# Altium PCB Juno_Light_Driver.PcbDoc
Units mm, origin at the board's own origin, x right, y up, seen from the top; angles counter-clockwise.
Board outline 60 x 60 mm, 2 copper layers (Top Layer, Bottom Layer); 30 components, 61 nets, 201 pads, 130 vias.
Unrouted connection lines stored in the file: 1.
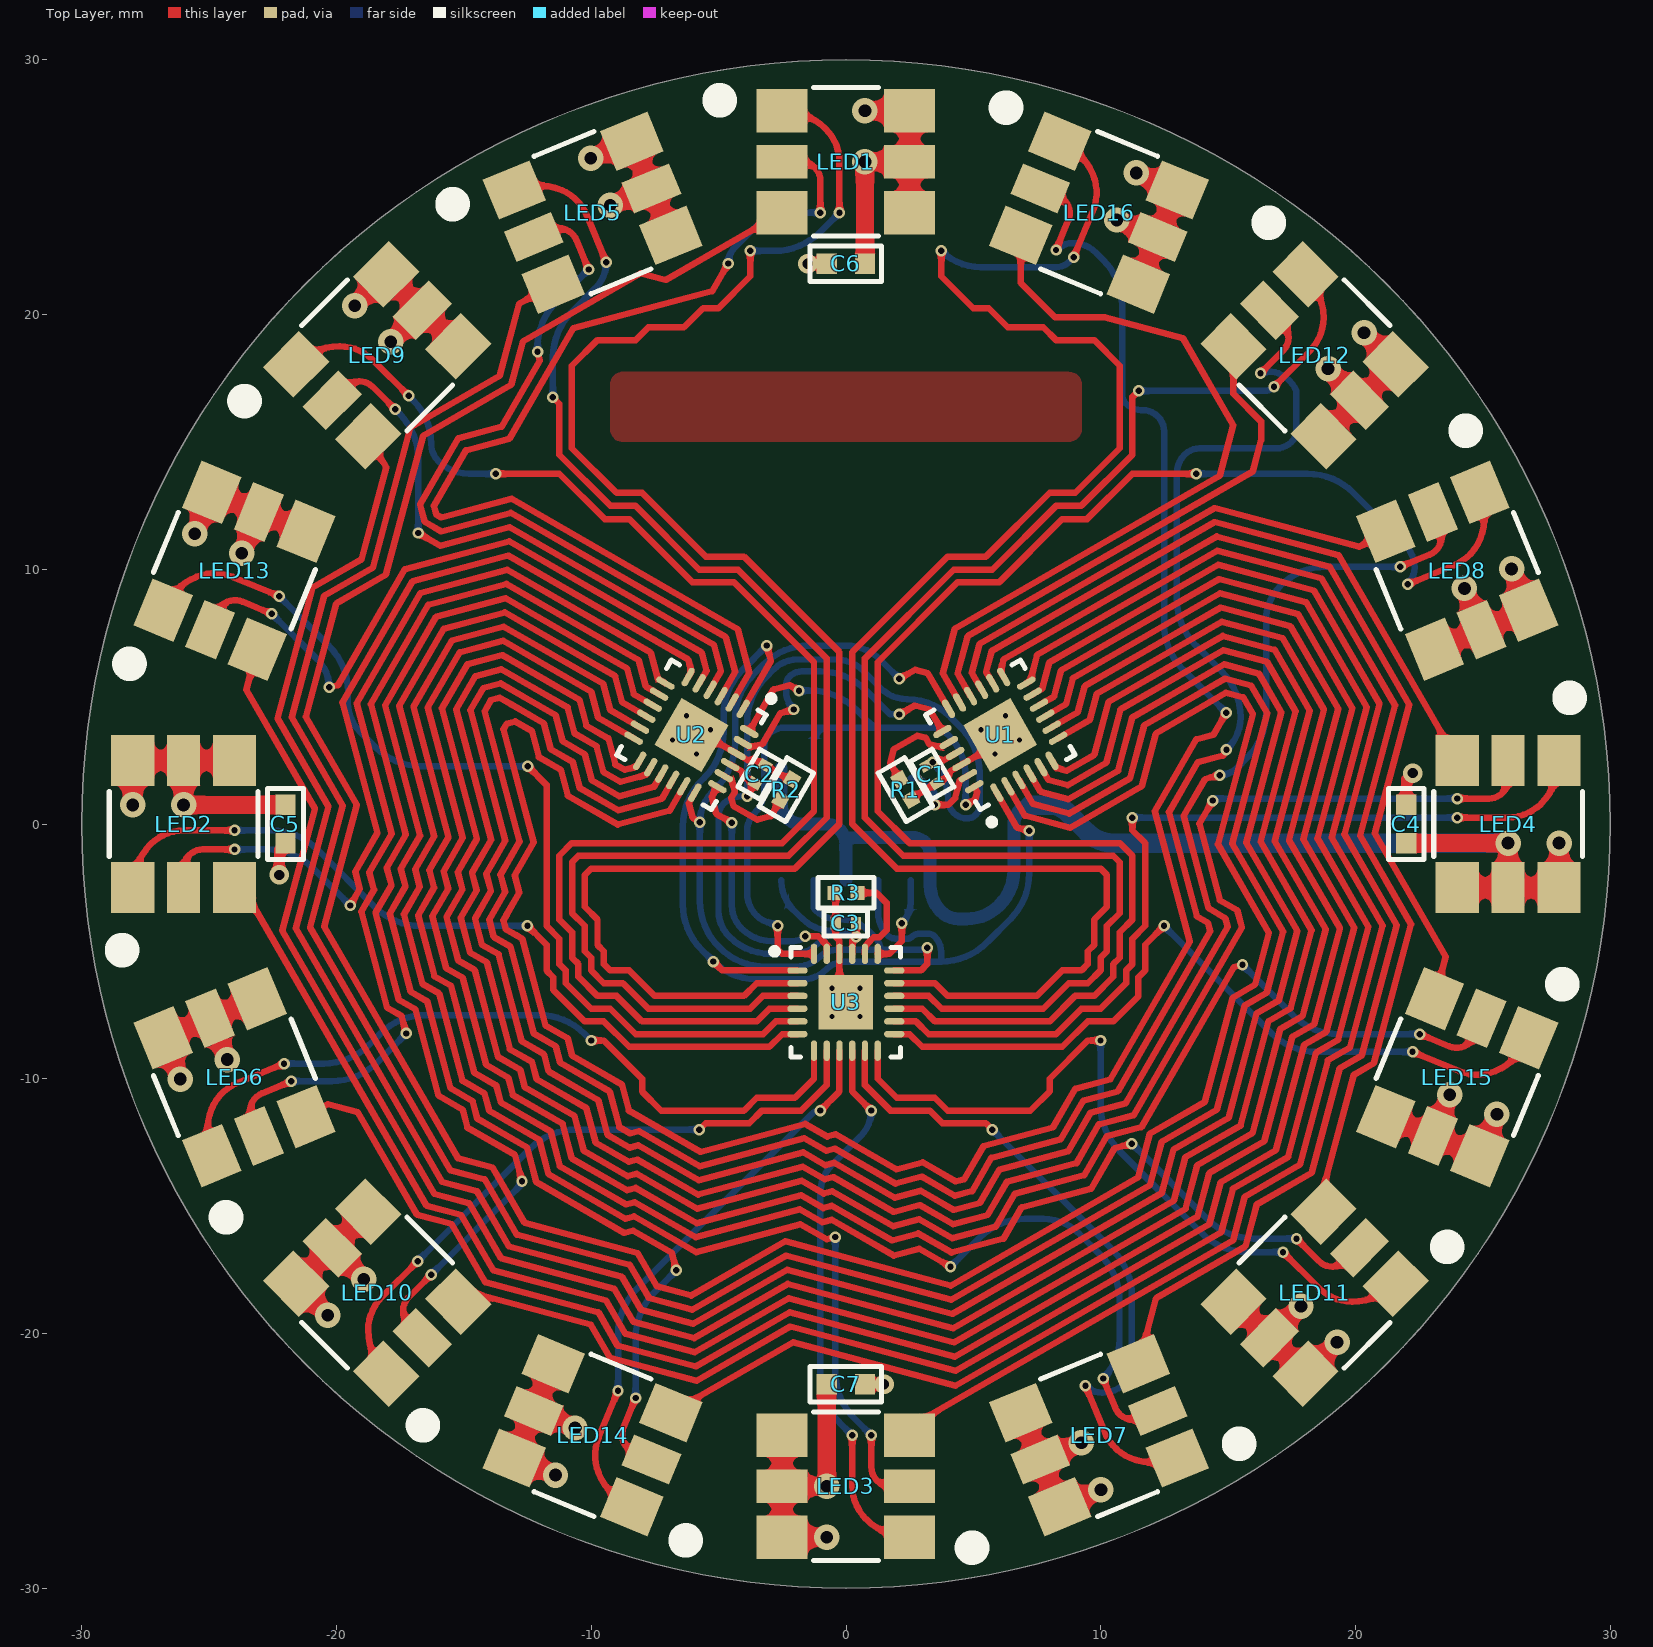
[diagram p0: Top Layer view]
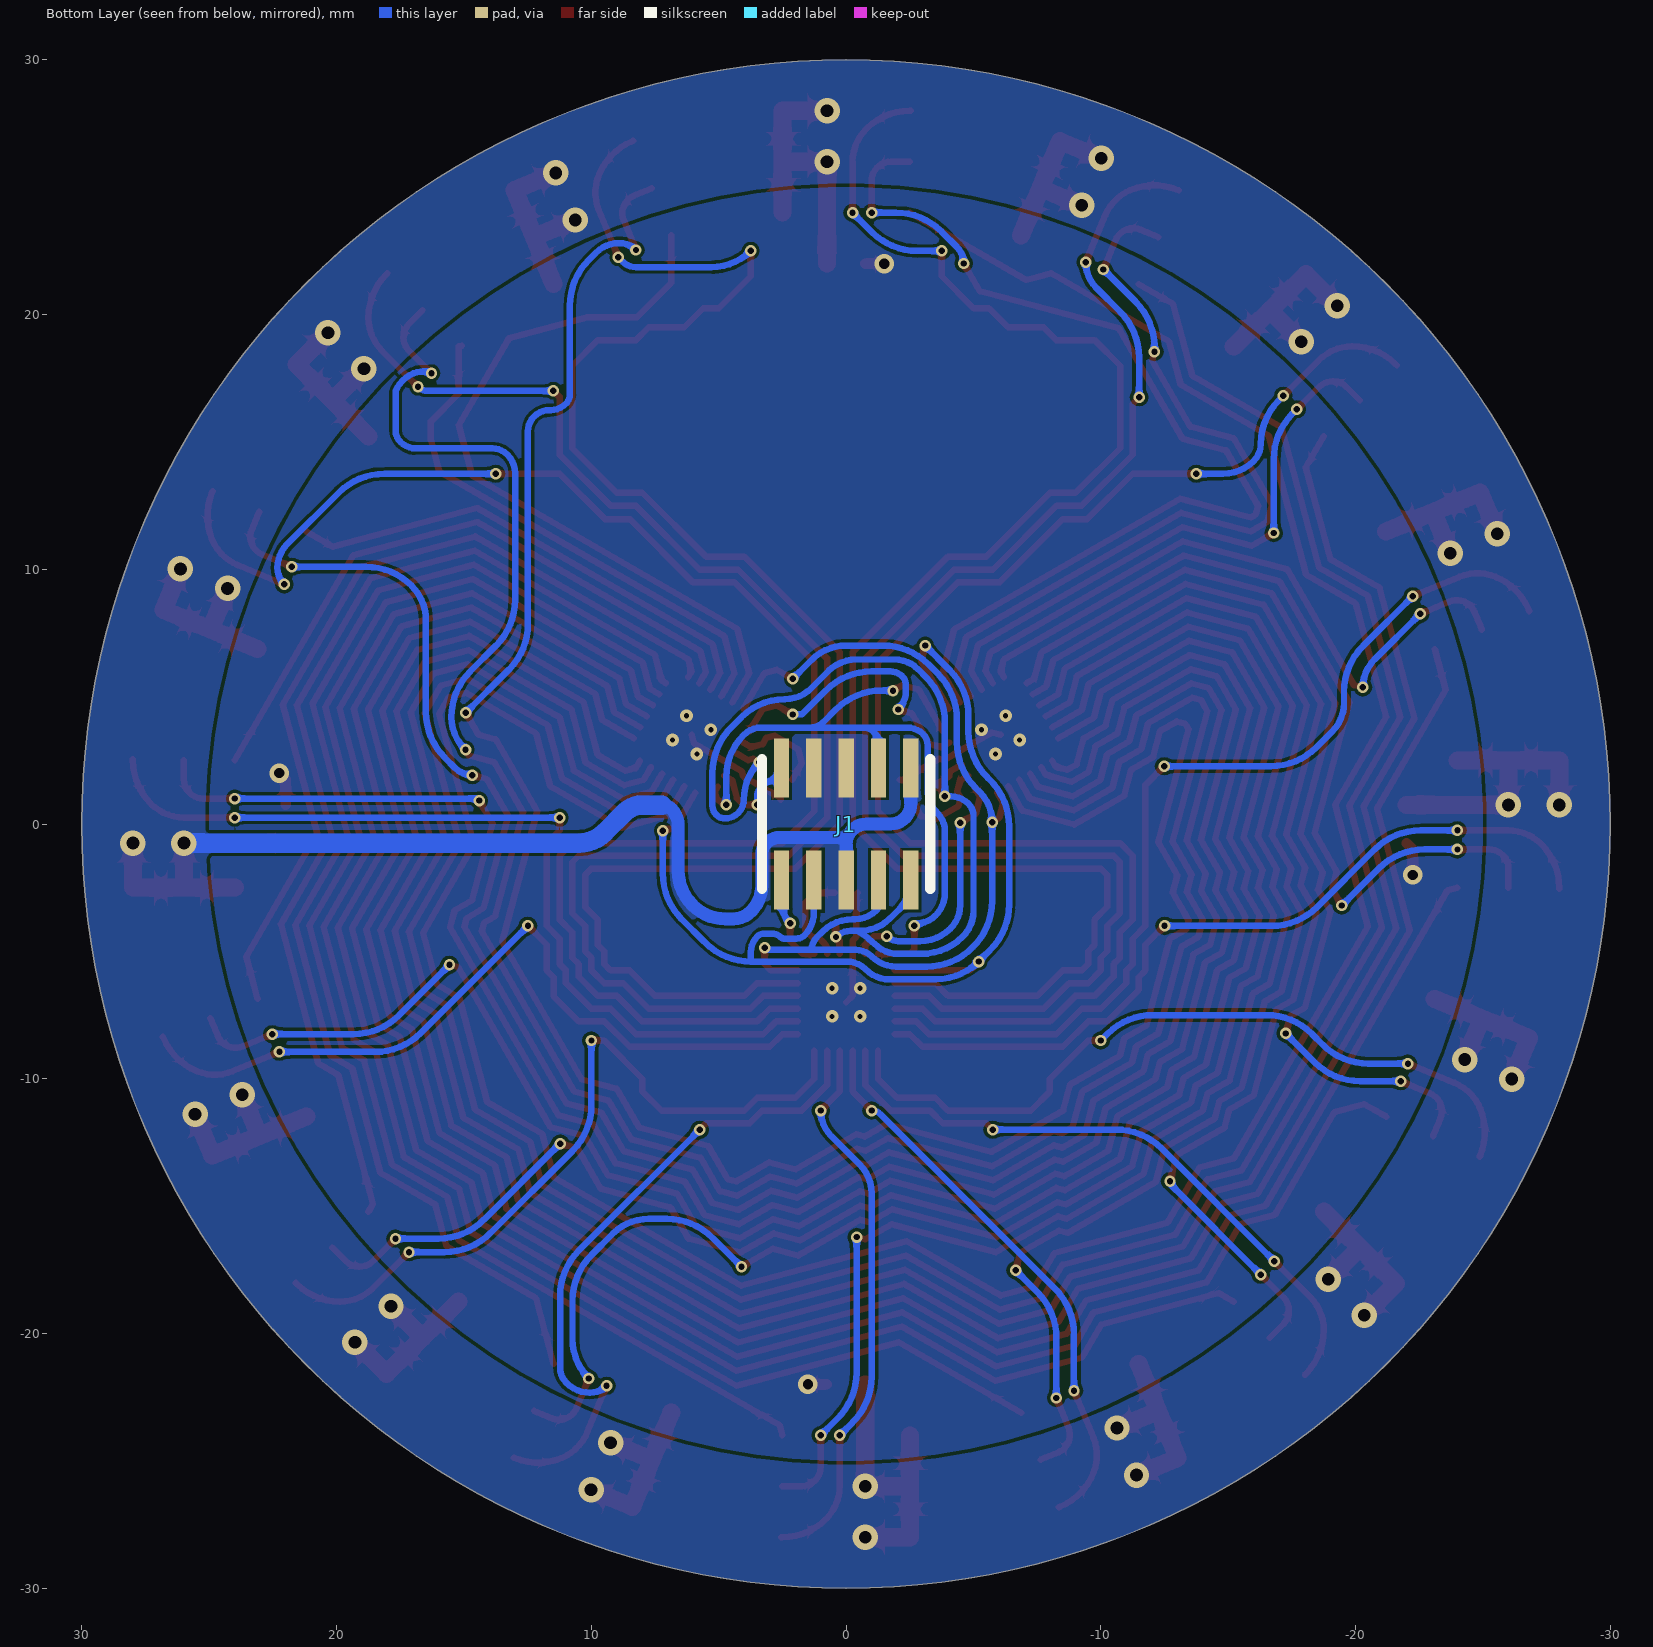
[diagram p1: Bottom Layer view, seen from below]
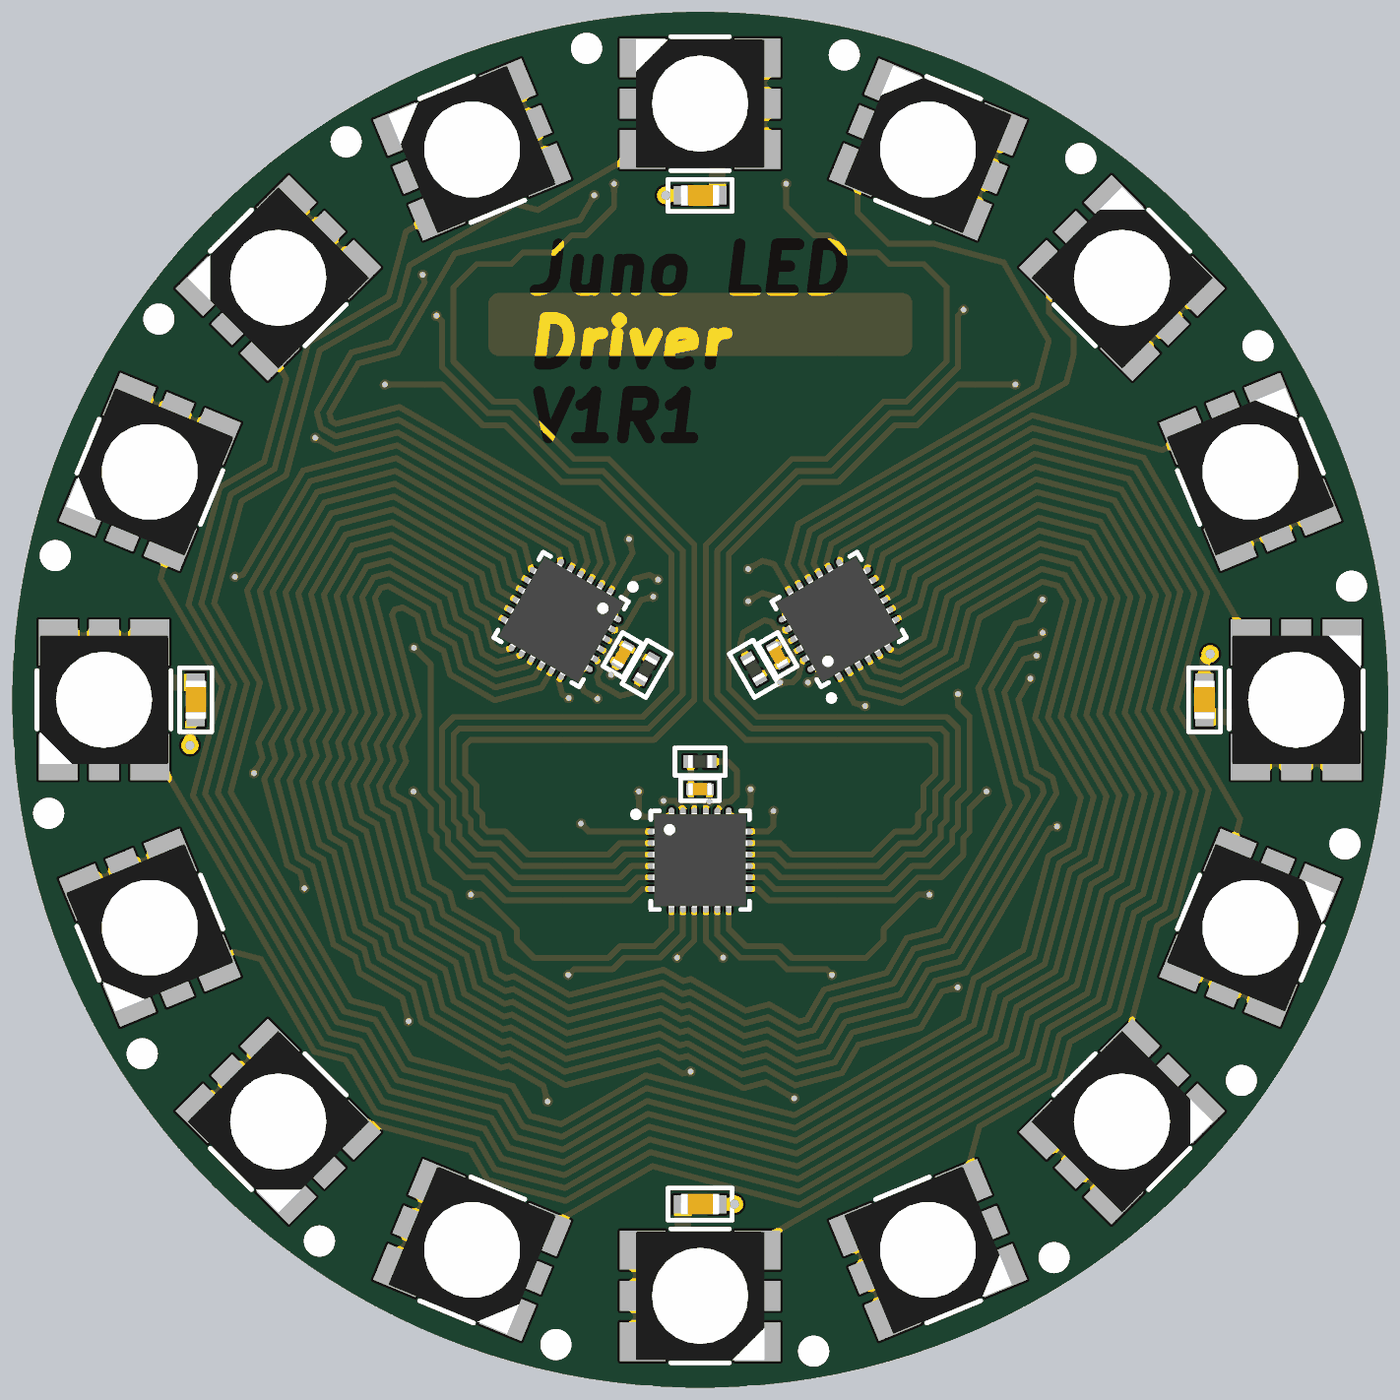
[diagram p2: 3D render of the assembled board from above, using the file's embedded part models]

## Layer stack, top to bottom
Top Solder: solder mask 0.0102, Solder Resist, Dk 3.5
Top Layer: signal copper 0.0356
Dielectric 1: dielectric 0.32, FR-4, Dk 4.8
Bottom Layer: signal copper 0.0356
Bottom Solder: solder mask 0.0102, Solder Resist, Dk 3.5

## Board outline
-30,0 ccw(c0,0) 0,-30 ccw(c0,0) 30,0 ccw(c0,0) 0,30 ccw(c0,0)

## Design rules (kind name [scope] priority, off if disabled: settings)
Clearance [All] p1: gap=0.127 ignorepadtopadclearanceinfootprint=FALSE
MinimumSolderMaskSliver [All] p1 off: minsoldermaskwidth=0.254
PolygonConnect [All] p1: connectstyle=Direct reliefconductorwidth=0.254 reliefentries=4 polygonreliefangle="90 Angle" airgapwidth=0.254
RoutingVias [All] p1: holewidth=0.711 width=1.27 viastyle="Through Hole" minholewidth=0.2 minwidth=0.45 maxholewidth=0.711 maxwidth=1.27
SilkToSilkClearance [All] p1 off: silktosilkclearance=0.254
SilkToSolderMaskClearance [IsPad] p1 off: minsilkscreentomaskgap=0.254 clearancetoexposedcopper=TRUE
SolderMaskExpansion [All] p1: expansion=0.102
Width [All] p1: maxlimit=5.08 minlimit=0.152 preferedwidth=0.254 minimp=50.000000 maximp=50.000000 favimp=50.000000
27 further rules are at their usual default settings.

## Classes and differential pairs
component class "[02] - TRICOLOR LEDS": C4 C5 C6 C7 LED1 LED2 LED3 LED4 LED5 LED6 LED7 LED8 LED9 LED10 LED11 LED12 LED13 LED14 LED15 LED16
component class "[01] - LED DRIVER": C1 C2 C3 J1 R1 R2 R3 U1 U2 U3

## Components (designator, comment, footprint, x,y, rotation, side; value= is the part's Value field where it differs from the comment)
C1 "0.1uF" C0402 3.372,1.95 r300 top
C2 "0.1uF" C0402 -3.383,1.95 r60 top
C3 "0.1uF" C0402 -0.006,-3.9 r180 top
C4 "10uF" C0603 21.994,0 r90 top
C5 "10uF" C0603 -22.006,0 r270 top
C6 "10uF" C0603 -0.006,22 r180 top
C7 "10uF" C0603 -0.006,-22 r0 top
J1 "20021121-00010C4LF" 20021121-00010C4LF -0.006,0 r180 bottom
LED1 "SLV6A-FKB-CK1P1G1BB7R3R3" "CREE SLV6A-FKB" -0.006,26 r0 top
LED2 "SLV6A-FKB-CK1P1G1BB7R3R3" "CREE SLV6A-FKB" -26.006,0 r90 top
LED3 "SLV6A-FKB-CK1P1G1BB7R3R3" "CREE SLV6A-FKB" -0.006,-26 r180 top
LED4 "SLV6A-FKB-CK1P1G1BB7R3R3" "CREE SLV6A-FKB" 25.994,0 r270 top
LED5 "SLV6A-FKB-CK1P1G1BB7R3R3" "CREE SLV6A-FKB" -9.947,24 r22.5 top
LED6 "SLV6A-FKB-CK1P1G1BB7R3R3" "CREE SLV6A-FKB" -24.006,-9.941 r112.5 top
LED7 "SLV6A-FKB-CK1P1G1BB7R3R3" "CREE SLV6A-FKB" 9.935,-24 r202.5 top
LED8 "SLV6A-FKB-CK1P1G1BB7R3R3" "CREE SLV6A-FKB" 23.994,9.941 r292.5 top
LED9 "SLV6A-FKB-CK1P1G1BB7R3R3" "CREE SLV6A-FKB" -18.406,18.4 r45 top
LED10 "SLV6A-FKB-CK1P1G1BB7R3R3" "CREE SLV6A-FKB" -18.406,-18.4 r135 top
LED11 "SLV6A-FKB-CK1P1G1BB7R3R3" "CREE SLV6A-FKB" 18.394,-18.4 r225 top
LED12 "SLV6A-FKB-CK1P1G1BB7R3R3" "CREE SLV6A-FKB" 18.394,18.4 r315 top
LED13 "SLV6A-FKB-CK1P1G1BB7R3R3" "CREE SLV6A-FKB" -24.006,9.941 r67.5 top
LED14 "SLV6A-FKB-CK1P1G1BB7R3R3" "CREE SLV6A-FKB" -9.947,-24 r157.5 top
LED15 "SLV6A-FKB-CK1P1G1BB7R3R3" "CREE SLV6A-FKB" 23.994,-9.941 r247.5 top
LED16 "SLV6A-FKB-CK1P1G1BB7R3R3" "CREE SLV6A-FKB" 9.935,24 r337.5 top
R1 "18K" R0402 2.332,1.35 r120 top
R2 "18K" R0402 -2.344,1.35 r240 top
R3 "18K" R0402 -0.006,-2.7 r0 top
U1 "LED1642GWQTR" QFN24 6.056,3.5 r120 top
U2 "LED1642GWQTR" QFN24 -6.068,3.5 r240 top
U3 "LED1642GWQTR" QFN24 -0.006,-7 r0 top

## Footprints (in the part's own frame and the unit in brackets; to place one, negate y for a bottom-side part, rotate by r counter-clockwise, add the part's x,y. Pads: shape width x height; smd on the part's side, far side on the other; paste and mask are expansions set on the pad)
20021121-00010C4LF [mm]
  rect 0.6x2.3 smd: 1(-2.54,2.2) 2(-1.27,2.2) 3(0,2.2) 4(1.27,2.2) 5(2.54,2.2) 6(2.54,-2.2) 7(1.27,-2.2) 8(0,-2.2) 9(-1.27,-2.2) 10(-2.54,-2.2)
  silkscreen extent -3.3,-2.54 3.3,2.54, body extent -3.18,-2.75 3.17,2.75, height 4.5
C0402 [mm] "Chip Capacitor, 2-Leads, Body 1.00x0.50mm, IPC Medium Density"
  rect 0.4x0.5 smd: 1(-0.4,0) 2(0.4,0)
  silkscreen extent -0.85,-0.5 0.85,0.5, body extent -0.52,-0.27 0.53,0.28, height 0.55
C0603 [mm] "Chip Capacitor, 2-Leads, Body 1.60x0.80mm, IPC Medium Density"
  rect 0.8x0.8 smd: 1(-0.75,0) 2(0.75,0)
  silkscreen extent -1.4,-0.7 1.4,0.7, body extent -0.85,-0.45 0.85,0.45, height 0.9
"CREE SLV6A-FKB" [mm]
  rect 2x1.7 smd: 1(-2.5,2) 3(-2.5,-2) 4(2.5,-2) 6(2.5,2)
  rect 2x1.3 smd: 2(-2.5,0) 5(2.5,0)
  silkscreen extent -5.13,-2.92 1.27,2.92, body extent -2.8,-2.8 2.8,2.8, height 2.6
QFN24 [mm] "QFN, 24-Leads, Body 3.93x3.93mm, Pitch 0.50mm, Thermal Pad 2.13x2.13mm, IPC High Density"
  oval 0.8x0.25 smd: 1(-1.9,1.25) 2(-1.9,0.75) 3(-1.9,0.25) 4(-1.9,-0.25) 5(-1.9,-0.75) 6(-1.9,-1.25) 13(1.9,-1.25) 14(1.9,-0.75) 15(1.9,-0.25) 16(1.9,0.25) 17(1.9,0.75) 18(1.9,1.25)
  oval 0.25x0.8 smd: 7(-1.25,-1.9) 8(-0.75,-1.9) 9(-0.25,-1.9) 10(0.25,-1.9) 11(0.75,-1.9) 12(1.25,-1.9) 19(1.25,1.9) 20(0.75,1.9) 21(0.25,1.9) 22(-0.25,1.9) 23(-0.75,1.9) 24(-1.25,1.9)
  rect 2.13x2.13 smd: 25(0,0)
  silkscreen extent -2.92,-2.15 2.15,2.15, body extent -2.05,-2.05 2.05,2.05, height 1
R0402 [mm] "Chip Resistor, 2-Leads, Body 1.00x0.50mm, IPC Medium Density"
  rect 0.55x0.55 smd: 1(-0.45,0) 2(0.45,0)
  silkscreen extent -1.1,-0.6 1.1,0.6, body extent -0.52,-0.28 0.52,0.28, height 0.4

## Part data
C1 C2 C3: library part CL05B104KO5NNNC, "Cap Ceramic 0.1uF 16V X7R 10% SMD 0402 125C C/T", Capacitance=100nF, Case/Package=0402, Case Code (Metric)=1005, Dielectric=X7R, Manufacturer 1=Samsung, Max Operating Temperature=125°C, Min Operating Temperature=-55°C, Package Quantity=1, Supplier Part Number 1=1276-1001-6-ND, Tolerance=10%, Voltage=16V, Case Code (Imperial)=0402, ComponentLink1Description=https://datasheet.ciiva.com/16208/cl05b104kq5nnnc-16208343.pdf, ComponentLink1URL=https://datasheet.ciiva.com/16208/cl05b104kq5nnnc-16208343.pdf, ComponentLink2Description=https://datasheet.ciiva.com/26920/getdatasheetpartid-359683-26920169.pdf, ComponentLink2URL=https://datasheet.ciiva.com/26920/getdatasheetpartid-359683-26920169.pdf, ComponentLink3Description=https://datasheet.ciiva.com/26309/mlcc-catalogdownload2013-eng-26309003.pdf, ComponentLink3URL=https://datasheet.ciiva.com/26309/mlcc-catalogdownload2013-eng-26309003.pdf, ComponentLink4Description=https://datasheet.ciiva.com/29198/458718-da-01-en-vs-kondensator-0402-29198423.pdf, ComponentLink4URL=https://datasheet.ciiva.com/29198/458718-da-01-en-vs-kondensator-0402-29198423.pdf, Contact Plating=Tin, Depth=0.5mm, Description 1="Cap Ceramic 0.1uF 16V X7R 10% SMD 0402 125C Paper T/R", Height=0.5mm, Lead Free="Lead Free", Length=1mm, Manufacturer Part Number 1=CL05B104KO5NNNC, Material=Ceramic, Mount="Surface Mount", Packaging="Tape and Reel", Pricing 1="1=0.1, 10=0.018, 100=0.0081, 500=0.0058, 1000=0.0045, 2500=0.0041, 5000=0.0038 (USD)", Radiation Hardening=No, Stock 1=9531, Supplier 1=Digi-Key, Thickness=0.022inch, Voltage Rating=16V, Voltage Rating (DC)=16V, Width=0.02inch
C4 C5 C6 C7: library part GRM188R61A106KE69D, "Cap Ceramic 10uF 10V X5R 10% SMD 0603 85C Paper T/R", Case/Package=0603, Case Code (Metric)=1608, Dielectric=X5R, Manufacturer=Murata, Max Operating Temperature=85°C, Min Operating Temperature=-55°C, Supplier Part Number 1=490-10474-1-ND, Tolerance=10%, Voltage=10V, Capacitance=10uF, Case Code (Imperial)=0603, Depth=0.8mm, Description 1="Cap Ceramic 10uF 10V X5R 10% SMD 0603 85C Paper T/R", Height=0.8mm, Lead Free="Lead Free", Length=1.6mm, Manufacturer Part Number 1=GRM188R61A106KE69D, Mount="Surface Mount", Packaging="Tape and Reel", Pricing="1=0.22, 10=0.149, 100=0.0754, 500=0.05158, 1000=0.04563 (USD)", REACH SVHC="No SVHC", Stock=40000, Supplier 1=Digi-Key, Thickness=0.037inch, Voltage Rating=10V, Voltage Rating (DC)=10V, Width=0.031inch
J1: "CONN HEADER SMD 10POS 1.27MM", Color=Black, Contact Resistance=30mR, Current Rating=1A, Insulation Resistance=100MR, Manufacturer="Amphenol FCI", Max Operating Temperature=85°C, Max Voltage Rating (AC)=125V, Min Operating Temperature=-40°C, Package Quantity=600, Supplier Part Number 1=609-3695-1-ND, ComponentLink1Description=https://www.verical.com/server-webapp/html/getDatasheet?partID=177140&src-supplier=Verical, ComponentLink1URL=https://www.verical.com/server-webapp/html/getDatasheet?partID=177140&src-supplier=Verical, ComponentLink2Description=http://portal.fciconnect.com/Comergent/fci/drawing/20021121.pdf?src-supplier=Avnet, ComponentLink2URL=http://portal.fciconnect.com/Comergent/fci/drawing/20021121.pdf?src-supplier=Avnet, ComponentLink3Description=https://cdn.amphenol-icc.com/media/wysiwyg/files/drawing/20021121.pdf?src-supplier=Digi-Key, ComponentLink3URL=https://cdn.amphenol-icc.com/media/wysiwyg/files/drawing/20021121.pdf?src-supplier=Digi-Key, ComponentLink4Description=http://portal.fciconnect.com/Comergent/fci/drawing/20021121.pdf?src-supplier=Avnet+Europe, ComponentLink4URL=http://portal.fciconnect.com/Comergent/fci/drawing/20021121.pdf?src-supplier=Avnet+Europe, ComponentLink5Description=https://media.digikey.com/pdf/Data%20Sheets/FCI%20PDFs/Minitek%20127_Catalog.pdf?src-supplier=Digi-Key, ComponentLink5URL=https://media.digikey.com/pdf/Data%20Sheets/FCI%20PDFs/Minitek%20127_Catalog.pdf?src-supplier=Digi-Key, ComponentLink6Description=http://portal.fciconnect.com/Comergent//fci/drawing/20021121.pdf?src-supplier=Mouser, ComponentLink6URL=http://portal.fciconnect.com/Comergent//fci/drawing/20021121.pdf?src-supplier=Mouser, Connector Type="Male Pin,Header", Contact Material="Copper Alloy,Copper,Gold", Contact Mating Length=0.12inch, Contact Plating=Gold, Depth=3.4mm, Gender=Male, Housing Color=Black, Housing Material=Thermoplastic, Length=6.35mm, Manufacturer Part Number=20021121-00010C4LF, Mount="Surface Mount", Number of Contacts=10, Number of Positions=10, Number of Rows=2, Orientation=Straight, Packaging="Tape and Reel", Pitch=1.27mm, Pricing 1="1=0.84, 10=0.739, 100=0.6372 (USD)", Radiation Hardening=No, REACH SVHC="No SVHC", Row Spacing=0.05inch, Stack Height=3mm, Stock 1=79305, Supplier 1=Digi-Key, Termination=Solder, Voltage Rating=125V
LED1 LED2 LED3 LED4 LED5 LED6 LED7 LED8 LED9 LED10 LED11 LED12 LED13 LED14 LED15 LED16: "LED RGB 6PLCC SMD", Case/Package=SMD/SMT, Color=Blue,Green,Red, Forward Voltage=3.2V, Manufacturer=Cree, Supplier Part Number 1=SLV6A-FKB-CK1P1G1BB7R3R3CT-ND, Test Current=20mA, Dominant Wavelength=470nm, Height=2.6mm, Length=5.5mm, Luminous Intensity=420mcd, Manufacturer Part Number=SLV6A-FKB-CK1P1G1BB7R3R3, Mount="Surface Mount", Packaging="Tape and Reel", Pricing 1="1=0.42, 10=0.395, 100=0.3648, 1000=0.32631 (USD)", Stock 1=101474, Supplier 1=Digi-Key, Width=5.3mm
R1 R2 R3: library part CRGCQ0402F18K, Manufacturer="TE Connectivity", Supplier Part Number 1=A129642CT-ND, Manufacturer Part Number=CRGCQ0402F18K, Pricing 1="1=0.1, 10=0.022, 100=0.009, 1000=0.00406, 2500=0.00352, 5000=0.00291 (USD)", Stock 1=128806, Supplier 1=Digi-Key
U1 U2 U3: "IC LED DRIVER LIN DIM 40MA 24QFN", Case/Package=QFN, Frequency=30MHz, Manufacturer=STMicroelectronics, Max Input Voltage=5.5V, Max Operating Temperature=85°C, Max Output Current=50mA, Max Output Voltage=19V, Max Supply Current=10mA, Min Input Voltage=3V, Min Operating Temperature=-40°C, Nominal Input Voltage (DC)=3.3V, Output Current per Channel=40mA, Package Quantity=4000, Supplier Part Number 1=497-14029-1-ND, ComponentLink1Description=http://www.st.com/content/ccc/resource/technical/document/datasheet/ae/9b/e2/7c/7d/66/41/08/DM00080246.pdf/files/DM00080246.pdf/jcr:content/translations/en.DM00080246.pdf?src-supplier=Digi-Key, ComponentLink1URL=http://www.st.com/content/ccc/resource/technical/document/datasheet/ae/9b/e2/7c/7d/66/41/08/DM00080246.pdf/files/DM00080246.pdf/jcr:content/translations/en.DM00080246.pdf?src-supplier=Digi-Key, ComponentLink2Description=https://www.verical.com/server-webapp/html/getDatasheet?partID=789956&src-supplier=Verical, ComponentLink2URL=https://www.verical.com/server-webapp/html/getDatasheet?partID=789956&src-supplier=Verical, ComponentLink3Description=http://www.st.com/web/en/resource/technical/document/datasheet/DM00080246.pdf?src-supplier=Avnet, ComponentLink3URL=http://www.st.com/web/en/resource/technical/document/datasheet/DM00080246.pdf?src-supplier=Avnet, Dimming=PWM, Height=0.95mm, Lead Free="Lead Free", Length=4.15mm, Manufacturer Part Number=LED1642GWQTR, Max Input Voltage (DC)=5.5V, Max Supply Voltage=5.5V, Min Input Voltage (DC)=3V, Min Supply Voltage=3V, Mount="Surface Mount", Nominal Supply Current=10mA, Number of Channels=16, Number of Outputs=16, Number of Pins=24, Operating Supply Voltage=3.3V, Output Current=50mA, Output Voltage=19V, Packaging="Tape and Reel", Pricing 1="1=2.1, 10=1.883, 100=1.5138, 500=1.24372, 1000=1.03052 (USD)", Radiation Hardening=No, REACH SVHC="No SVHC", Stock 1=43999, Supplier 1=Digi-Key, Switching Frequency=30MHz, Width=4.15mm

## Via types
v1: diameter 0.45, hole 0.25, Top Layer to Bottom Layer, tented both sides, 82 vias
v2: diameter 1, hole 0.5, Top Layer to Bottom Layer, 32 vias
v3: diameter 0.5, hole 0.2, Top Layer to Bottom Layer, 12 vias
v4: diameter 0.762, hole 0.406, Top Layer to Bottom Layer, 4 vias

## Nets (pads, with @x,y where several pads share a name; then routed paths per layer and width w, separated by ;. In a path a pad name is that pad's centre, name@x,y a point inside that pad or via, vN(x,y) a via of type N, cw(c..) or ccw(c..) an arc to the next point about the centre after c; other vN are vias at no path point)
+3V3: C1.1 C2.1 C3.1 J1.6 U1.21 U2.21 U3.21 | length 39.7
  Top Layer w0.254: U2.21 -4.101,2.076 -4.047,1.871 C2.1 v1(-3.883,1.084) ; U3.21 0.244,-4.585 v1(0.394,-4.435) C3.1 ; v1(3.403,2.43) 3.635,2.564 3.84,2.509 U1.21
  Bottom Layer w0.254: J1.6 ccw(c-0.876,-2.2) -2.057,-3.381 -1.738,-3.7 ccw(c-0.543,-2.505) -0.543,-4.195 -0.442,-4.195 ; v1(0.394,-4.435) ccw(c-0.185,-5.014) -0.185,-4.195 -0.442,-4.195 ; v1(3.403,2.43) cw(c1.927,0.954) 4.014,0.954 ccw(c4.75,0.954) 4.75,0.219 ccw(c4.75,0.711) 5.242,0.711 5.242,2.004 ccw(c2.702,2.004) 4.498,3.8 4.103,4.195 ccw(c2.402,2.494) 2.402,4.9 cw(c2.402,6.367) 1.365,5.329 0.694,6 ccw(c-0.411,4.895) -0.411,6.458 -1.906,6.458 ccw(c-1.906,5.149) -2.832,6.074 -3.14,5.766 ccw(c-1.343,3.97) -3.883,3.97 v1(-3.883,1.084) -4.12,1.084 ccw(c-4.12,0.114) -4.806,0.8 ccw(c-4.323,0.317) -5.006,0.317 -5.006,-3.4 ccw(c-3.557,-3.4) -4.582,-4.424 ccw(c-2.95,-2.793) -2.95,-5.1 -2.072,-5.1 ccw(c-2.072,-3.734) -1.106,-4.7 -1.05,-4.644 cw(c0.746,-6.44) -0.442,-4.195
+VBATT: C4.1 C5.1 C6.1 C7.1 J1.5 J1.8 LED1.4 LED1.5 LED1.6 LED2.4 LED2.5 LED2.6 LED3.4 LED3.5 LED3.6 LED4.4 LED4.5 LED4.6 LED5.4 LED5.5 LED5.6 LED6.4 LED6.5 LED6.6 LED7.4 LED7.5 LED7.6 LED8.4 LED8.5 LED8.6 LED9.4 LED9.5 LED9.6 LED10.4 LED10.5 LED10.6 LED11.4 LED11.5 LED11.6 LED12.4 LED12.5 LED12.6 LED13.4 LED13.5 LED13.6 LED14.4 LED14.5 LED14.6 LED15.4 LED15.5 LED15.6 LED16.4 LED16.5 LED16.6 | length 174.5
  Top Layer w0.711: v2(-28.006,0.75) LED2.6 LED2.5 ; v2(-26.141,-10.013) LED6.6 LED6.5 ; v2(-25.567,11.399) LED13.6 LED13.5 ; v2(-24.293,-9.248) LED6.5 ; LED2.4 LED2.5 ; v2(-23.719,10.634) LED13.5 ; LED6.4 LED6.5 ; C5.1 v2(-26.006,0.75) LED2.5 ; LED13.4 LED13.5 ; v2(-20.35,-19.284) LED10.6 LED10.5 ; v2(-19.29,20.345) LED9.6 LED9.5 ; v2(-18.936,-17.87) LED10.5 ; LED10.4 LED10.5 ; v2(-17.876,18.93) LED9.5 ; LED9.4 LED9.5 ; LED14.4 LED14.5 ; v2(-11.405,-25.561) LED14.6 LED14.5 ; v2(-10.64,-23.713) LED14.5 ; v2(-10.019,26.135) LED5.6 LED5.5 ; v2(-9.254,24.287) LED5.5 ; LED5.4 LED5.5 ; LED3.4 LED3.5 ; v2(-0.756,-28) LED3.6 LED3.5 ; C7.1 v2(-0.756,-26) LED3.5 ; C6.1 v2(0.744,26) LED1.5 ; v2(0.744,28) LED1.6 LED1.5 ; LED1.4 LED1.5 ; LED7.4 LED7.5 ; v2(9.242,-24.287) LED7.5 ; v2(10.008,-26.135) LED7.6 LED7.5 ; v2(10.628,23.713) LED16.5 ; v2(11.393,25.561) LED16.6 LED16.5 ; LED16.4 LED16.5 ; LED11.4 LED11.5 ; v2(17.864,-18.93) LED11.5 ; LED12.4 LED12.5 ; v2(18.924,17.87) LED12.5 ; v2(19.278,-20.345) LED11.6 LED11.5 ; v2(20.339,19.284) LED12.6 LED12.5 ; LED15.4 LED15.5 ; C4.1 v2(25.994,-0.75) LED4.5 ; LED8.4 LED8.5 ; v2(23.707,-10.634) LED15.5 ; LED4.4 LED4.5 ; v2(24.281,9.248) LED8.5 ; v2(25.555,-11.399) LED15.6 LED15.5 ; v2(26.129,10.013) LED8.6 LED8.5 ; v2(27.994,-0.75) LED4.6 LED4.5
  Bottom Layer w0.508: J1.5 -2.546,0.796 ccw(c-1.75,0.796) -1.75,0 -0.802,0 cw(c-0.802,-0.796) -0.006,-0.796 ; J1.8 -0.006,-0.796 ; 0.247,-0.543 ccw(c0.247,-0.796) -0.006,-0.796 ; 0.399,-0.523 2.58,-0.523 cw(c2.58,-1.299) 3.129,-0.75 cw(c2.703,-1.176) 3.306,-1.176 3.306,-2.408 ccw(c4.768,-2.408) 3.734,-3.442 ccw(c4.424,-2.752) 4.424,-3.727 4.725,-3.727 ccw(c4.725,-1.888) 6.025,-3.189 ccw(c4.667,-1.83) 6.588,-1.83 6.588,-0.049 cw(c7.491,-0.049) 6.853,0.59 cw(c7.222,0.22) 7.222,0.743
  Bottom Layer w0.762: 7.222,0.743 8.018,0.743 cw(c8.018,-0.185) 8.674,0.471 9.471,-0.326 ccw(c10.495,0.698) 10.495,-0.75 v2(25.994,-0.75)
CLK: J1.4 U1.24 U2.24 U3.24 | length 30.6
  Top Layer w0.254: U2.24 -2.846,5.282 -2.213,5.451 v1(-1.845,5.239) ; v1(-2.682,-4) -2.682,-4.926 -2.507,-5.1 U3.24 ; v1(4.7,0.754) 5.076,0.971 5.154,1.262 U1.24
  Bottom Layer w0.254: v1(-2.682,-4) -2.782,-3.9 cw(c-2.782,-2.876) -3.506,-3.6 -3.514,-3.592 cw(c-2.622,-2.7) -3.883,-2.7 -3.883,-0.27 cw(c-2.936,-0.27) -3.606,0.4 ccw(c-4.572,1.366) -3.605,0.401 ccw(c-4.572,1.366) -3.206,1.366 -3.206,3.101 cw(c-2.607,3.101) -3.031,3.525 cw(c-2.409,2.903) -2.409,3.782 -0.666,3.782 ; v1(-1.845,5.239) -1.397,5.239 cw(c-1.397,2.699) 0.399,4.495 0.894,4 ccw(c1.42,4.526) 0.895,3.999 ccw(c1.42,4.526) 1.42,3.782 ; J1.4 -1.276,3.19 cw(c-0.696,3.19) -1.106,3.6 cw(c-0.666,3.16) -0.666,3.782 ; v1(4.7,0.754) 4.7,1.844 ccw(c2.359,1.844) 4.014,3.5 ccw(c3.333,2.819) 3.333,3.782 1.42,3.782 ; -0.666,3.782 1.42,3.782
GND: C1.2 C2.2 C3.2 C4.2 C5.2 C6.2 C7.2 J1.2 J1.3 R1.1 R2.1 R3.1 U1.22 U1.25 U2.22 U2.25 U3.22 U3.25 | length 18.2
  Top Layer w0.254: U2.25 -5.727,3.591 U2.22 -3.851,2.509 -3.647,2.564 C2.2 -2.188,1.721 R2.1 ; R3.1 -0.406,-2.75 C3.2 -0.406,-4.435 -0.256,-4.585 U3.22 -0.256,-6.75 U3.25 ; R1.1 2.576,1.029 C1.2 4.035,1.871 4.09,2.076 ; U1.25 5.965,3.158 U1.22 ; 4.09,2.076 U1.22 ; 4.09,2.076 U1.22
  Top Layer w0.406: v4(-22.256,-2) -22.256,-1 C5.2 ; v4(-1.506,22) C6.2 ; C7.2 v4(1.494,-22) ; C4.2 21.994,1.75 v4(22.244,2)
  other v3: -0.556,-7.55 0.544,-7.55 -0.556,-6.45 0.544,-6.45 -5.867,2.749 5.855,2.749 -6.819,3.299 6.808,3.299 -5.317,3.701 5.305,3.701 -6.269,4.251 6.258,4.251
LE: J1.9 U1.1 U2.1 U3.1 | length 43.7
  Top Layer w0.254: v1(-5.206,-5.4) -4.856,-5.75 U3.1 ; U2.1 -2.946,6.408 v1(-3.106,7.006) ; U1.1 6.715,-0.142 v1(7.194,-0.27)
  Bottom Layer w0.254: v1(-3.106,7.006) -4.062,6.05 ccw(c-2.266,4.254) -4.806,4.254 -4.806,3.624 cw(c-7.346,3.624) -5.55,1.828 -5.662,1.716 ccw(c-3.866,-0.08) -6.406,-0.08 -6.406,-3.148 ccw(c-3.866,-3.148) -6.398,-3.343 ccw(c-3.866,-3.148) -5.662,-4.944 v1(-5.206,-5.4) ccw(c-3.516,-3.71) -3.516,-6.1 -1.722,-6.1 ccw(c-1.722,-4.734) -0.756,-5.7 cw(c-0.032,-6.424) -0.032,-5.4 3.734,-5.4 ; J1.9 1.264,-3.486 ccw(c2.508,-3.486) 1.628,-4.366 ccw(c1.953,-4.041) 1.953,-4.5 2.411,-4.5 ccw(c2.411,-4.241) 2.594,-4.424 cw(c2.894,-4.724) 2.894,-4.3 3.208,-4.3 cw(c3.208,-4.683) 3.479,-4.412 cw(c2.862,-5.029) 3.734,-5.029 3.734,-5.4 ; v1(7.194,-0.27) 7.194,-1.94 cw(c4.654,-1.94) 6.45,-3.736 5.576,-4.61 5.53,-4.656 cw(c3.734,-2.86) 3.734,-5.4
NetR1_2: R1.2 U1.20 | length 4.2
  Top Layer w0.254: R1.2 1.732,2.389 1.879,2.936 2.803,3.469 3.127,3.383 3.268,3.138 U1.20@3.719,3.017 ; U1.20@3.719,3.017 U1.20 U1.20@3.719,3.017
NetR2_2: R2.2 U2.20 | length 3.8
  Top Layer w0.254: U2.20 -4.481,1.718 -4.36,1.267 -4.502,1.022 -4.415,0.698 -3.491,0.164 -2.944,0.311 R2.2
NetR3_2: R3.2 U3.20 | length 3.8
  Top Layer w0.254: R3.2 1.194,-2.7 1.594,-3.1 1.594,-4.167 1.315,-4.446 1.087,-4.446 0.865,-4.668 ; U3.20 0.744,-4.96 cw(c1.157,-4.96) 0.865,-4.668
NetU1_19: U1.19 U2.23 | length 11.5
  Top Layer w0.254: U2.23 -3.731,3.017 -3.28,3.138 -2.579,4.352 v1(-2.047,4.495) ; v1(2.094,4.3) 2.701,4.651 3.289,4.493 U1.19
  Bottom Layer w0.254: v1(-2.047,4.495) cw(c-1.306,5.236) -2.354,5.236 -2.354,5.441 cw(c-1.847,5.441) -2.206,5.8 cw(c-1.738,5.332) -1.738,5.994 -1.012,5.994 cw(c-1.012,3.454) 0.784,5.25 1.734,4.3 v1(2.094,4.3)
NetU2_19: U2.19 U3.23 | length 9.9
  Top Layer w0.254: U2.19 -5.273,1.078 -5.09,0.395 v1(-4.483,0.045) ; -1.369,-4.404 -1.086,-4.404 -0.756,-4.735 U3.23
  Bottom Layer w0.254: v1(-4.483,0.045) -4.483,-3.189 ccw(c-3.195,-3.189) -4.106,-4.1 ccw(c-2.899,-2.893) -2.899,-4.6 -2.056,-4.6 ccw(c-2.056,-3.959) v1(-1.602,-4.412)
OUTB0: LED1.1 U3.2 | length 65.6
  Top Layer w0.254: v1(-3.756,22.5) -3.756,21.5 -5.006,20.25 -5.612,20.25 -6.362,19.5 -7.756,19.5 -8.256,19 -9.756,19 -10.763,17.993 -10.763,14.755 -9.008,13 -8.006,13 -5.506,10.5 -4.006,10.5 -0.256,6.75 -0.256,0 -2.006,-1.75 -10.006,-1.75 -10.258,-2.002 -10.258,-3.248 -9.756,-3.75 -9.756,-4.75 -9.506,-5 -9.506,-5.5 -9.256,-5.75 -8.506,-5.75 -7.506,-6.75 -4.006,-6.75 -3.506,-6.25 U3.2 ; LED1.1@-2.551,28 LED1.1 cw(c-2.506,25.586) -0.799,27.293 cw(c-2.109,25.982) -0.256,25.982 v1(-0.256,24)
  Bottom Layer w0.254: v1(-3.756,22.5) -2.808,22.5 ccw(c-2.808,25.04) -1.012,23.244 v1(-0.256,24)
OUTB1: LED5.1 U3.3 | length 58
  Top Layer w0.254: LED5.1@-13.064,24.874 LED5.1 cw(c-12.098,22.661) -11.174,24.891 cw(c-11.884,23.179) -10.171,23.888 v1(-9.413,22.057) ; v1(-11.506,16.75) -11.256,16.5 -11.256,14.5 -9.256,12.5 -8.274,12.5 -5.756,9.982 -4.238,9.982 -0.756,6.5 -0.756,0.25 -2.256,-1.25 -10.506,-1.25 -10.756,-1.5 -10.756,-3.5 -10.256,-4 -10.256,-5 -10.006,-5.25 -10.006,-5.75 -9.506,-6.25 -8.756,-6.25 -7.756,-7.25 -3.766,-7.25 -3.266,-6.75 U3.3
  Bottom Layer w0.254: v1(-11.506,16.75) -11.506,18.316 cw(c-8.966,18.316) -10.762,20.112 -9.833,21.041 ccw(c-10.849,22.057) v1(-9.413,22.057)
OUTB2: LED9.1 U3.4 | length 57.4
  Top Layer w0.254: LED9.1@-21.62,18.015 LED9.1 cw(c-19.881,16.339) -19.881,18.754 cw(c-19.881,16.9) -18.57,18.211 v1(-17.169,16.809) ; v1(-13.756,13.75) -11.256,13.75 -9.476,11.97 -8.506,11.97 -6.036,9.5 -4.402,9.5 -1.256,6.354 -1.256,0.5 -2.506,-0.75 -10.763,-0.75 -11.256,-1.243 -11.256,-3.75 -10.756,-4.25 -10.756,-5.25 -10.506,-5.5 -10.506,-6 -9.756,-6.75 -9.006,-6.75 -8.006,-7.75 -3.506,-7.75 -3.006,-7.25 U3.4
  Bottom Layer w0.254: v1(-17.169,16.809) -16.993,16.634 cw(c-18.704,14.923) -16.285,14.923 ccw(c-15.333,14.923) -16.006,14.25 ccw(c-14.799,15.457) -14.799,13.75 v1(-13.756,13.75)
OUTB3: LED13.1 U3.5 | length 38.1
  Top Layer w0.254: LED13.1@-26.828,8.355 LED13.1 cw(c-24.58,7.473) -25.504,9.703 cw(c-24.795,7.991) -24.085,9.703 v1(-22.254,8.945) ; v1(-12.488,2.267) -11.756,1.535 -11.756,-4 -11.256,-4.5 -11.256,-5.5 -11.006,-5.75 -11.006,-6.25 -10.006,-7.25 -9.256,-7.25 -8.256,-8.25 -3.256,-8.25 -2.756,-7.75 U3.5
  Bottom Layer w0.254: v1(-22.254,8.945) -20.296,6.986 cw(c-22.092,5.19) -19.552,5.19 -19.552,4.75 ccw(c-17.969,4.75) -19.088,3.631 -18.468,3.011 ccw(c-16.672,4.807) -16.672,2.267 v1(-12.488,2.267)
OUTB4: LED2.1 U3.6 | length 31.9
  Top Layer w0.254: LED2.1@-28.006,-2.545 LED2.1 cw(c-25.592,-2.5) -27.299,-0.793 cw(c-25.988,-2.104) -25.988,-0.25 v1(-24.006,-0.25) ; v1(-12.506,-4) -12.499,-4 -11.756,-4.743 -11.756,-5.748 -11.491,-6.013 -11.491,-6.515 -10.256,-7.75 -9.506,-7.75 -8.506,-8.75 -3.006,-8.75 -2.506,-8.25 U3.6
  Bottom Layer w0.254: v1(-24.006,-0.25) -22.558,-0.25 cw(c-22.558,-2.79) -20.762,-0.994 -18.5,-3.256 ccw(c-16.704,-1.46) -16.704,-4 v1(-12.506,-4)
OUTB5: LED6.1 U3.7 | length 30.1
  Top Layer w0.254: LED6.1@-24.88,-13.058 LED6.1 cw(c-22.667,-12.092) -24.897,-11.168 cw(c-23.185,-11.878) -23.894,-10.165 v1(-22.063,-9.407) ; v1(-10.006,-8.5) -9.506,-8.5 -8.006,-10 -8.006,-10.5 -7.25,-11.256 -4.006,-11.256 -3.5,-10.75 -2.006,-10.75 -1.256,-10 U3.7
  Bottom Layer w0.254: v1(-22.063,-9.407) -20.511,-9.407 ccw(c-20.511,-6.867) -18.715,-8.663 -18.297,-8.244 cw(c-16.5,-10.04) -16.5,-7.5 -12.058,-7.5 cw(c-12.058,-10.04) -10.262,-8.244 v1(-10.006,-8.5)
OUTB6: LED10.1 U3.8 | length 25.5
  Top Layer w0.254: LED10.1@-18.02,-21.614 LED10.1 cw(c-16.345,-19.875) -18.76,-19.875 cw(c-16.906,-19.875) -18.217,-18.564 v1(-16.815,-17.163) ; v1(-5.756,-12) -5.506,-11.75 -3.799,-11.75 -3.299,-11.249 -1.755,-11.249 -0.756,-10.25 U3.8
  Bottom Layer w0.254: v1(-16.815,-17.163) -12.396,-12.744 ; -12.396,-12.744 cw(c-10.6,-14.54) -10.6,-12 v1(-5.756,-12)
OUTB7: LED14.1 U3.9 | length 22.3
  Top Layer w0.254: v1(-8.951,-22.248) -9.709,-24.079 ccw(c-7.997,-24.789) -9.709,-25.498 ccw(c-7.479,-24.574) LED14.1 LED14.1@-8.361,-26.822 ; v1(-1.006,-11.249) -0.256,-10.499 U3.9
  Bottom Layer w0.254: v1(-8.951,-22.248) -8.951,-20.043 cw(c-6.411,-20.043) -8.207,-18.247 -1.352,-11.393 cw(c-1.006,-11.739) v1(-1.006,-11.249)
OUTB8: LED3.1 U3.10 | length 21.9
  Top Layer w0.254: v1(0.244,-24) 0.244,-25.982 ccw(c2.098,-25.982) 0.787,-27.293 ccw(c2.494,-25.586) LED3.1 LED3.1@2.539,-28 ; U3.10 0.244,-10.499 v1(0.994,-11.249)
  Bottom Layer w0.254: v1(0.244,-24) -0.262,-23.494 cw(c1.534,-21.698) -1.006,-21.698 -1.006,-14.5 cw(c0.599,-14.5) -0.536,-13.365 0.58,-12.249 ccw(c-0.42,-11.249) v1(0.994,-11.249)
OUTB9: LED7.1 U3.11 | length 26.4
  Top Layer w0.254: U3.11 0.744,-10.25 1.743,-11.249 3.287,-11.249 3.787,-11.75 5.494,-11.75 v1(5.744,-12) ; v1(9.401,-22.057) 10.159,-23.888 ccw(c11.872,-23.179) 11.162,-24.891 ccw(c12.086,-22.661) LED7.1 LED7.1@13.052,-24.874
  Bottom Layer w0.254: v1(5.744,-12) 10.482,-16.737 cw(c8.685,-18.534) 11.225,-18.534 11.225,-21.336 cw(c10.359,-21.336) 10.972,-21.949 cw(c10.056,-21.034) 10.056,-22.328 cw(c10.056,-21.401) v1(9.401,-22.057)
OUTB10: LED11.1 U3.12 | length 29.7
  Top Layer w0.254: U3.12 1.244,-10 1.994,-10.75 3.488,-10.75 3.994,-11.256 7.238,-11.256 7.994,-10.5 7.994,-10 9.494,-8.5 v1(9.994,-8.5) ; v1(17.157,-16.809) 18.558,-18.211 ccw(c19.869,-16.9) 19.869,-18.754 ccw(c19.869,-16.339) LED11.1 LED11.1@21.608,-18.015
  Bottom Layer w0.254: v1(9.994,-8.5) 9.994,-11.039 ccw(c12.534,-11.039) 10.738,-12.835 13.968,-16.065 ccw(c15.764,-14.269) 15.764,-16.809 v1(17.157,-16.809)
OUTB11: LED15.1 U3.13 | length 30.9
  Top Layer w0.254: U3.13 2.494,-8.25 2.994,-8.75 8.494,-8.75 9.494,-7.75 10.494,-7.75 11.479,-6.765 11.479,-6.013 11.744,-5.748 11.744,-4.743 v1(12.487,-4) v1@12.494,-4 ; v1(22.242,-8.945) 24.073,-9.703 ccw(c24.783,-7.991) 25.492,-9.703 ccw(c24.568,-7.473) LED15.1 LED15.1@26.816,-8.355
  Bottom Layer w0.254: v1(12.487,-4) 16.688,-8.201 ccw(c18.484,-6.405) 18.484,-8.945 v1(22.242,-8.945)
OUTB12: LED4.1 U3.14 | length 35.3
  Top Layer w0.254: U3.14 2.744,-7.75 3.244,-8.25 8.244,-8.25 9.244,-7.25 9.994,-7.25 10.994,-6.25 10.994,-5.75 11.244,-5.5 11.244,-4.5 11.744,-4 11.744,-0.75 11.241,-0.247 v1(11.241,0.25) ; v1(23.994,0.25) 25.976,0.25 ccw(c25.976,2.104) 27.287,0.793 ccw(c25.58,2.5) LED4.1 LED4.1@27.994,2.545
  Bottom Layer w0.254: v1(11.241,0.25) v1(23.994,0.25)
OUTB13: LED8.1 U3.15 | length 63.1
  Top Layer w0.254: U3.15 2.994,-7.25 3.494,-7.75 7.994,-7.75 8.994,-6.75 9.744,-6.75 10.494,-6 10.494,-5.5 10.744,-5.25 10.744,-4.25 11.244,-3.75 11.244,-1.243 10.751,-0.75 2.494,-0.75 1.244,0.5 1.244,6.354 4.39,9.5 6.024,9.5 8.494,11.97 9.464,11.97 11.244,13.75 v1(13.744,13.75) ; v1(22.051,9.407) 23.882,10.165 ccw(c23.173,11.878) 24.885,11.168 ccw(c22.655,12.092) LED8.1 LED8.1@24.868,13.058
  Bottom Layer w0.254: v1(13.744,13.75) 18.118,13.75 cw(c18.118,11.21) 19.914,13.006 21.943,10.978 cw(c21.028,10.062) 22.322,10.062 cw(c21.395,10.062) v1(22.051,9.407)
OUTB14: LED12.1 U3.16 | length 57.6
  Top Layer w0.254: U3.16 3.254,-6.75 3.754,-7.25 7.744,-7.25 8.744,-6.25 9.494,-6.25 9.994,-5.75 9.994,-5.25 10.244,-5 10.244,-4 10.744,-3.5 10.744,-1.5 10.494,-1.25 2.244,-1.25 0.744,0.25 0.744,6.5 4.226,9.982 5.744,9.982 8.262,12.5 9.244,12.5 11.244,14.5 11.244,16.765 v1(11.487,17.007) ; v1(16.803,17.163) 18.205,18.564 ccw(c16.894,19.875) 18.748,19.875 ccw(c16.333,19.875) LED12.1 LED12.1@18.009,21.614
  Bottom Layer w0.254: v1(11.487,17.007) 16.428,17.007 ccw(c16.428,17.537) v1(16.803,17.163)
OUTB15: LED16.1 U3.17 | length 67.1
  Top Layer w0.254: U3.17 3.494,-6.25 3.994,-6.75 7.494,-6.75 8.494,-5.75 9.244,-5.75 9.494,-5.5 9.494,-5 9.744,-4.75 9.744,-3.75 10.246,-3.248 10.246,-2.002 9.994,-1.75 1.994,-1.75 0.244,0 0.244,6.75 3.994,10.5 5.494,10.5 7.994,13 8.996,13 10.751,14.755 10.751,17.993 9.744,19 8.244,19 7.744,19.5 6.35,19.5 5.6,20.25 4.994,20.25 3.744,21.5 v1(3.744,22.5) ; LED16.1@8.349,26.822 LED16.1 cw(c7.467,24.574) 9.697,25.498 cw(c7.985,24.789) 9.697,24.079 v1(8.939,22.248)
  Bottom Layer w0.254: v1(3.744,22.5) ccw(c5.293,24.049) 5.293,21.858 8.244,21.858 ccw(c8.244,22.595) 8.765,22.074 v1(8.939,22.248)
OUTG0: LED1.2 U2.2 | length 40.7
  Top Layer w0.254: v1(-4.621,22.006) -5.246,20.923 -10.71,19.459 -13.213,15.125 -14.92,14.668 -16.176,12.492 -16.085,12.15 -15.883,12.034 -13.128,12.772 -5.55,8.397 -4.251,7.647 -3.794,5.94 U2.2 ; LED1.2 -1.756,26 cw(c-1.756,25.25) -1.006,25.25 v1(-1.006,24)
  Bottom Layer w0.254: v1(-4.621,22.006) cw(c-3.707,22.006) -4.354,22.652 -3.75,23.256 cw(c-1.954,21.46) -1.954,24 v1(-1.006,24)
OUTG1: LED5.2 U2.3 | length 31.8
  Top Layer w0.254: LED5.2 -11.564,23.33 cw(c-11.277,22.637) -10.584,22.924 v1(-10.105,21.77) ; v1(-12.11,18.535) -12.019,18.196 -13.515,15.605 -15.22,15.148 -16.724,12.544 -16.541,11.861 -15.887,11.484 -13.161,12.214 -6.017,8.089 -4.718,7.339 -4.352,5.973 U2.3
  Bottom Layer w0.254: v1(-12.11,18.535) -12.11,18.713 cw(c-9.57,18.713) -11.366,20.509 v1(-10.105,21.77)
OUTG2: LED9.2 U2.4 | length 23.3
  Top Layer w0.254: LED9.2 -19.643,17.163 cw(c-19.113,16.632) -18.583,17.163 v1(-17.699,16.279) ; v1(-16.793,11.424) -15.927,10.924 -13.195,11.656 -6.483,7.781 -5.184,7.031 -4.91,6.007 U2.4
  Bottom Layer w0.254: v1(-17.699,16.279) -17.537,16.117 cw(c-19.333,14.321) -16.793,14.321 v1(-16.793,11.424)
OUTG3: LED13.2 U2.5 | length 26.8
  Top Layer w0.254: LED13.2 -24.676,8.324 cw(c-23.983,8.037) -23.696,8.73 v1(-22.541,8.252) ; v1(-20.293,5.362) -19.944,5.455 -17.322,9.997 -13.224,11.095 -6.964,7.482 -5.665,6.732 -5.476,6.025 U2.5
  Bottom Layer w0.254: v1(-22.541,8.252) -20.747,6.458 cw(c-21.843,5.362) v1(-20.293,5.362)
OUTG4: LED2.2 U2.6 | length 35.3
  Top Layer w0.254: LED2.2 -26.006,-1.75 cw(c-25.256,-1.75) -25.256,-1 v1(-24.006,-1) ; v1(-19.463,-3.2) -19.088,-2.551 -19.271,-1.868 -18.396,-0.352 -19.768,4.77 -17.018,9.533 -13.262,10.54 -7.487,7.206 -6.188,6.456 -6.067,6.002 U2.6
  Bottom Layer w0.254: v1(-24.006,-1) -22.715,-1 cw(c-22.715,-3.54) -20.919,-1.744 v1(-19.463,-3.2)
OUTG5: LED6.2 U2.7 | length 38.8
  Top Layer w0.254: LED6.2 -23.336,-11.558 cw(c-22.643,-11.271) -22.93,-10.578 v1(-21.776,-10.1) ; v1(-17.264,-8.222) -17.447,-7.539 -18.019,-7.209 -19.026,-3.453 -18.528,-2.59 -18.713,-1.901 -17.838,-0.386 -19.21,4.737 -16.71,9.067 -13.295,9.982 -8.965,7.482 -7.666,6.732 -7.392,5.708 U2.7
  Bottom Layer w0.254: v1(-21.776,-10.1) -20.193,-10.1 ccw(c-20.193,-7.56) -18.397,-9.356 v1(-17.264,-8.222)
OUTG6: LED10.2 U2.8 | length 45.3
  Top Layer w0.254: LED10.2 -17.169,-19.637 cw(c-16.638,-19.107) -17.169,-18.577 v1(-16.285,-17.693) ; v1(-12.72,-14.021) -12.995,-12.997 -14.863,-11.918 -15.051,-11.217 -15.995,-10.672 -16.905,-7.275 -17.557,-6.899 -18.472,-3.484 -17.845,-2.397 -18.026,-1.72 -18.03,-1.718 -17.28,-0.419 -18.652,4.703 -16.402,8.6 -13.329,9.424 -8.133,6.424 -7.858,5.4 U2.8
  Bottom Layer w0.254: v1(-16.285,-17.693) -12.796,-14.204 ccw(c-12.978,-14.021) v1(-12.72,-14.021)
OUTG7: LED14.2 U2.9 | length 51.4
  Top Layer w0.254: v1(-8.258,-22.535) -8.736,-23.69 ccw(c-8.043,-23.977) -8.33,-24.67 LED14.2 ; U2.9 -8.325,5.092 -8.599,6.116 -9.898,6.866 -13.362,8.866 -16.094,8.134 -18.094,4.67 -16.722,-0.453 -17.477,-1.76 -17.294,-2.443 -17.914,-3.517 -17.09,-6.591 -16.441,-6.966 -15.526,-10.381 -14.66,-10.881 -14.477,-11.564 -12.528,-12.689 -12.162,-14.055 -8.698,-16.055 -8.356,-15.963 -6.841,-16.838 v1(-6.658,-17.521)
  Bottom Layer w0.254: v1(-8.258,-22.535) -8.258,-20.173 cw(c-5.718,-20.173) -7.514,-18.377 v1(-6.658,-17.521)
OUTG8: LED3.2 U2.10 | length 58.3
  Top Layer w0.254: U2.10 -8.791,4.783 -9.066,5.808 -10.365,6.558 -13.396,8.308 -15.787,7.667 -17.537,4.637 -16.164,-0.486 -16.914,-1.785 -16.731,-2.468 -17.356,-3.551 -16.624,-6.283 -15.974,-6.658 -15.059,-10.073 -14.193,-10.573 -14.01,-11.256 -12.044,-12.391 -11.678,-13.757 -8.664,-15.497 -8.323,-15.405 -5.887,-16.812 -1.789,-15.714 -0.761,-16.307 v1(-0.419,-16.216) ; v1(0.994,-24) 0.994,-25.25 ccw(c1.744,-25.25) 1.744,-26 LED3.2
  Bottom Layer w0.254: v1(-0.419,-16.216) -0.419,-21.535 ccw(c2.121,-21.535) 0.325,-23.331 v1(0.994,-24)
OUTG9: LED7.2 U2.11 | length 65.4
  Top Layer w0.254: U2.11 -9.258,4.475 -9.532,5.5 -13.429,7.75 -15.478,7.201 -16.978,4.603 -15.606,-0.52 -16.356,-1.819 -16.173,-2.502 -16.798,-3.584 -16.157,-5.975 -15.508,-6.35 -14.593,-9.765 -13.727,-10.265 -13.544,-10.948 -11.595,-12.073 -11.229,-13.439 -8.631,-14.939 -8.289,-14.847 -5.908,-16.222 -1.81,-15.124 -0.926,-15.635 -0.556,-15.535 1.882,-16.943 2.877,-16.676 v1(4.103,-17.383) ; v1(10.094,-21.77) 10.572,-22.924 ccw(c11.265,-22.637) 11.552,-23.33 LED7.2
  Bottom Layer w0.254: v1(4.103,-17.383) 5.242,-16.244 cw(c7.038,-18.04) 7.038,-15.5 7.744,-15.5 cw(c7.744,-17.495) 9.155,-16.084 9.994,-16.924 ; 9.994,-16.924 cw(c8.198,-18.72) 10.738,-18.72 10.738,-20.214 cw(c8.538,-20.214) v1(10.094,-21.77)
OUTG10: LED11.2 U2.12 | length 68
  Top Layer w0.254: U2.12 -9.724,4.167 -9.999,5.192 -13.463,7.192 -15.17,6.734 -16.418,4.574 -15.045,-0.548 -15.798,-1.852 -15.615,-2.535 -16.24,-3.618 -15.691,-5.667 -15.041,-6.042 -14.126,-9.457 -13.26,-9.957 -13.077,-10.64 -11.129,-11.765 -10.763,-13.131 -8.597,-14.381 -8.256,-14.289 -5.86,-15.673 -1.762,-14.575 -0.893,-15.077 -0.551,-14.985 1.813,-16.35 2.843,-16.074 4.142,-16.824 6.185,-16.276 6.892,-15.052 9.624,-14.32 10.542,-12.73 v1(11.225,-12.547) ; v1(17.687,-16.279) 18.571,-17.163 ccw(c19.101,-16.632) 19.631,-17.163 LED11.2
  Bottom Layer w0.254: v1(11.225,-12.547) 14.214,-15.535 ccw(c16.01,-13.739) 16.01,-16.279 v1(17.687,-16.279)
OUTG11: LED15.2 U2.13 | length 75.4
  Top Layer w0.254: U2.13 -8.235,2.248 -8.688,2.126 -9.05,2.335 -9.325,3.359 -10.191,3.859 -10.465,4.884 -11.764,5.634 -13.496,6.634 -14.862,6.268 -15.862,4.536 -14.49,-0.587 -15.243,-1.891 -15.06,-2.574 -15.682,-3.651 -15.224,-5.359 -14.575,-5.734 -13.66,-9.149 -12.794,-9.649 -12.611,-10.332 -10.662,-11.457 -10.296,-12.823 -8.564,-13.823 -8.222,-13.731 -5.841,-15.106 -1.743,-14.008 -0.877,-14.508 -0.535,-14.417 1.846,-15.792 2.871,-15.517 4.17,-16.267 5.877,-15.81 6.625,-14.514 9.357,-13.782 10.234,-12.263 11.6,-11.897 15.225,-5.618 v1(15.567,-5.527) ; v1(22.529,-8.252) 23.684,-8.73 ccw(c23.971,-8.037) 24.664,-8.324 LED15.2
  Bottom Layer w0.254: v1(15.567,-5.527) 17.548,-7.508 ccw(c19.344,-5.712) 19.344,-8.252 v1(22.529,-8.252)
OUTG12: LED4.2 U2.14 | length 82
  Top Layer w0.254: U2.14 -7.841,1.929 -8.87,1.653 -9.517,2.027 -9.791,3.051 -10.657,3.551 -10.932,4.576 -12.231,5.326 -13.53,6.076 -14.554,5.801 -15.304,4.502 -13.932,-0.62 -14.682,-1.919 -14.499,-2.602 -15.124,-3.685 -14.758,-5.051 -14.108,-5.426 -13.193,-8.841 -12.327,-9.341 -12.144,-10.024 -10.196,-11.149 -9.83,-12.515 -8.53,-13.265 -8.189,-13.173 -5.804,-14.55 -1.706,-13.452 -0.843,-13.95 -0.502,-13.859 1.876,-15.232 2.894,-14.959 4.201,-15.713 5.567,-15.347 6.319,-14.044 9.051,-13.312 9.926,-11.797 11.292,-11.431 15.542,-4.069 15.359,-3.386 14.68,-2.994 13.874,0.012 v1(14.399,0.921) ; v1(23.994,1) 25.244,1 ccw(c25.244,1.75) 25.994,1.75 LED4.2
  Bottom Layer w0.254: v1(14.399,0.921) cw(c14.59,0.73) 14.59,1 v1(23.994,1)
OUTG13: LED8.2 U2.15 | length 85.3
  Top Layer w0.254: U2.15 -7.535,1.46 -8.901,1.094 -9.983,1.719 -10.258,2.743 -11.124,3.243 -11.398,4.268 -12.697,5.018 -13.563,5.518 -14.246,5.335 -14.746,4.469 -13.374,-0.654 -13.874,-1.52 -14.124,-1.953 -13.941,-2.636 -14.566,-3.718 -14.291,-4.743 -13.642,-5.118 -12.727,-8.533 -11.861,-9.033 -11.678,-9.716 -9.729,-10.841 -9.363,-12.207 -8.497,-12.707 -8.155,-12.615 -5.774,-13.99 -1.676,-12.892 -0.81,-13.392 -0.468,-13.301 1.909,-14.674 2.934,-14.399 4.237,-15.151 5.261,-14.877 6.011,-13.578 8.725,-12.851 9.6,-11.335 10.984,-10.964 14.984,-4.036 14.893,-3.694 14.233,-3.313 13.26,0.317 14.097,1.766 v1(14.67,1.919) ; v1(21.764,10.1) 22.918,10.578 ccw(c22.631,11.271) 23.324,11.558 LED8.2
  Bottom Layer w0.254: v1(14.67,1.919) ccw(c14.67,2.876) 15.347,2.2 15.75,2.603 ccw(c13.954,4.399) 16.494,4.399 16.494,8 cw(c18.413,8) 17.056,9.357 cw(c18.848,7.565) 18.848,10.1 v1(21.764,10.1)
OUTG14: LED12.2 U2.16 | length 92.1
  Top Layer w0.254: U2.16 -7.227,0.993 -8.934,0.536 -10.45,1.411 -10.724,2.435 -11.59,2.935 -11.865,3.96 -13.164,4.71 -13.597,4.96 -13.938,4.868 -14.188,4.435 -12.816,-0.687 -13.566,-1.986 -13.383,-2.669 -14.008,-3.752 -13.825,-4.435 -13.175,-4.81 -12.26,-8.225 -11.394,-8.725 -11.219,-9.379 -9.27,-10.504 -8.896,-11.899 -8.463,-12.149 -8.122,-12.057 -5.74,-13.432 -1.642,-12.334 -0.776,-12.834 -0.435,-12.743 1.943,-14.116 2.967,-13.841 4.27,-14.593 4.953,-14.41 5.703,-13.111 8.435,-12.379 9.31,-10.864 10.676,-10.498 14.301,-4.219 14.21,-3.877 13.777,-3.627 12.679,0.471 13.804,2.419 14.801,2.687 v1(14.936,2.92) ; v1(16.273,17.693) 17.157,18.577 ccw(c16.626,19.107) 17.157,19.637 LED12.2
  Bottom Layer w0.254: v1(14.936,2.92) 14.987,2.971 ccw(c13.762,4.195) 15.494,4.195 15.494,4.198 ccw(c12.954,4.198) 14.75,5.994 13.738,7.006 cw(c15.534,8.802) 12.994,8.802 12.994,13.774 cw(c14.021,13.774) 13.295,14.5 13.302,14.507 cw(c13.889,13.92) 13.889,14.75 16.891,14.75 ccw(c16.89,15.604) 17.494,15 ccw(c17.038,15.456) 17.683,15.456 17.683,16.992 ccw(c16.487,16.497) 16.982,17.693 ccw(c16.628,16.836) v1(16.273,17.693) v1@16.238,17.658
OUTG15: LED16.2 U2.17 | length 91.4
  Top Layer w0.254: U2.17 -6.919,0.527 -8.968,-0.022 -10.916,1.103 -11.191,2.127 -12.057,2.627 -12.331,3.652 -12.981,4.027 -13.322,3.935 -13.447,3.719 -12.258,-0.721 -13.008,-2.02 -12.827,-2.693 -13.33,-3.564 -13.328,-3.574 -13.45,-3.785 -13.358,-4.127 -12.925,-4.377 -12.709,-4.502 -11.794,-7.917 -10.928,-8.417 -10.745,-9.1 -8.796,-10.225 -8.521,-11.249 -5.707,-12.874 -1.603,-11.775 -0.744,-12.27 -0.409,-12.18 1.98,-13.56 3.005,-13.285 4.303,-14.035 4.646,-13.943 5.395,-12.645 8.127,-11.913 9.002,-10.397 10.368,-10.031 13.493,-4.618 12.121,0.504 13.746,3.32 14.428,3.502 v1(14.928,4.368) ; LED16.2 8.318,24.67 cw(c8.031,23.977) 8.724,23.69 v1(8.246,22.535)
  Bottom Layer w0.254: v1(8.246,22.535) cw(c8.901,21.879) 8.901,22.806 cw(c8.901,21.512) 9.817,22.427 10.097,22.147 cw(c8.301,20.351) 10.841,20.351 10.841,16.869 ccw(c11.363,16.869) 10.994,16.5 ccw(c11.598,17.104) 11.598,16.25 11.641,16.25 cw(c11.64,15.396) 12.244,16 cw(c11.658,15.414) 12.487,15.414 12.487,7.861 ccw(c15.027,7.861) 13.231,6.065 v1(14.928,4.368)
OUTR0: LED1.3 U1.2 | length 114.4
  Top Layer w0.254: LED1.3 -7.08,21.359 -8.057,21.621 -12.68,18.952 -13.138,17.245 -16.602,15.245 -18.066,9.78 -20.014,8.655 -21.204,4.216 -19.204,0.752 -20.485,-4.029 -15.235,-13.123 -13.869,-13.489 -12.619,-15.654 -8.179,-16.843 -7.425,-18.15 -6.071,-18.513 -2.383,-16.383 4.106,-18.122 11.467,-13.872 11.925,-12.164 14.09,-10.914 15.188,-6.816 16.054,-6.316 16.603,-4.267 14.603,-0.803 15.975,4.319 15.6,4.969 14.917,5.152 12.174,3.568 12.163,3.527 11.614,1.478 8.799,-0.147 7.021,0.33 U1.2
OUTR1: LED5.3 U1.3 | length 107.8
  Top Layer w0.254: LED5.3 -12.836,20.419 -13.591,17.6 -17.094,15.577 -18.571,10.066 -20.481,8.963 -21.762,4.182 -19.762,0.718 -21.043,-4.063 -15.543,-13.589 -14.177,-13.955 -12.927,-16.12 -8.487,-17.31 -7.737,-18.609 -6.03,-19.066 -2.349,-16.941 4.139,-18.68 11.934,-14.18 12.391,-12.472 14.556,-11.222 15.654,-7.125 16.521,-6.625 17.161,-4.234 15.161,-0.77 16.533,4.353 15.908,5.435 14.884,5.71 11.708,3.876 11.148,1.786 8.766,0.411 7.329,0.796 U1.3
OUTR2: LED9.3 U1.4 | length 101.1
  Top Layer w0.254: LED9.3 -18.055,13.997 -19.023,10.382 -20.947,9.271 -22.32,4.149 -20.32,0.685 -21.601,-4.096 -15.851,-14.056 -14.485,-14.422 -13.235,-16.587 -8.795,-17.776 -8.045,-19.075 -5.996,-19.624 -2.316,-17.499 4.173,-19.238 12.4,-14.488 12.857,-12.781 15.023,-11.531 16.121,-7.432 16.987,-6.932 17.719,-4.2 15.719,-0.736 17.091,4.386 16.216,5.902 14.85,6.268 11.241,4.184 10.681,2.094 8.733,0.969 7.637,1.263 U1.4
OUTR3: LED13.3 U1.5 | length 93.3
  Top Layer w0.254: LED13.3 -23.543,5.268 -20.848,0.599 -22.129,-4.182 -16.159,-14.522 -14.793,-14.888 -13.543,-17.053 -9.103,-18.243 -8.353,-19.542 -5.963,-20.182 -2.282,-18.057 4.206,-19.796 12.867,-14.796 13.324,-13.088 15.489,-11.838 16.587,-7.74 17.454,-7.24 18.277,-4.167 16.277,-0.703 17.65,4.421 16.525,6.368 14.817,6.826 10.775,4.492 10.215,2.402 8.699,1.527 7.945,1.729 U1.5
OUTR4: LED2.3 U1.6 | length 85.6
  Top Layer w0.254: LED2.3 -23.617,-2.604 -16.467,-14.989 -15.101,-15.355 -13.851,-17.52 -9.411,-18.709 -8.661,-20.008 -5.929,-20.74 -2.249,-18.615 4.24,-20.354 13.333,-15.104 13.791,-13.396 15.956,-12.146 17.054,-8.048 17.919,-7.549 18.835,-4.133 16.835,-0.669 18.208,4.453 16.833,6.835 14.783,7.384 10.308,4.8 9.748,2.71 8.666,2.085 8.253,2.196 U1.6
OUTR5: LED6.3 U1.7 | length 78.7
  Top Layer w0.254: LED6.3 -20.355,-10.997 -19.165,-11.315 -16.84,-15.342 -15.474,-15.708 -14.159,-17.986 -9.719,-19.176 -8.969,-20.475 -5.896,-21.298 -2.215,-19.173 4.273,-20.912 13.8,-15.412 14.257,-13.704 16.422,-12.454 17.52,-8.356 18.386,-7.856 19.393,-4.1 17.393,-0.636 18.766,4.487 17.141,7.301 14.75,7.942 9.842,5.108 9.567,4.084 U1.7
OUTR6: LED10.3 U1.8 | length 71
  Top Layer w0.254: LED10.3 -14.636,-18.414 -10.023,-19.65 -9.277,-20.941 -5.862,-21.856 -2.182,-19.731 4.307,-21.47 14.266,-15.72 14.711,-14.06 16.876,-12.81 17.987,-8.664 18.853,-8.164 19.951,-4.066 17.951,-0.602 19.324,4.52 17.449,7.768 14.716,8.5 11.902,6.875 9.375,5.416 9.101,4.392 U1.8
OUTR7: LED14.3 U1.9 | length 63.7
  Top Layer w0.254: LED14.3 -2.08,-20.342 4.299,-22.052 14.733,-16.028 15.19,-14.321 17.355,-13.071 18.453,-8.972 19.319,-8.472 20.509,-4.033 18.509,-0.569 19.882,4.554 17.757,8.234 14.683,9.058 8.909,5.724 8.634,4.7 U1.9
OUTR8: LED3.3 U1.10 | length 55.9
  Top Layer w0.254: LED3.3 2.598,-23.611 15.199,-16.336 15.657,-14.629 17.822,-13.379 18.92,-9.281 19.786,-8.781 21.067,-4 19.067,-0.535 20.44,4.587 18.065,8.701 14.649,9.616 8.442,6.032 8.431,5.991 8.168,5.008 U1.10
OUTR9: LED7.3 U1.11 | length 49.1
  Top Layer w0.254: U1.11 7.702,5.316 7.976,6.34 14.616,10.174 18.373,9.167 20.942,4.716 19.57,-0.406 21.625,-3.966 20.253,-9.088 19.386,-9.588 18.288,-13.687 16.123,-14.937 15.682,-16.585 12.172,-18.611 LED7.3
OUTR10: LED11.3 U1.12 | length 40.9
  Top Layer w0.254: U1.12 7.235,5.624 7.498,6.607 7.509,6.648 14.583,10.732 18.681,9.634 21.556,4.654 20.183,-0.468 22.183,-3.932 20.719,-9.396 19.93,-9.852 18.573,-14.916 LED11.3
OUTR11: LED15.3 U1.13 | length 33.8
  Top Layer w0.254: U1.13 6.064,5.987 6.181,6.424 6.192,6.465 14.549,11.29 18.989,10.1 22.114,4.688 20.758,-0.37 23.549,-5.203 LED15.3
OUTR12: LED4.3 U1.14 | length 25.8
  Top Layer w0.254: U1.14 5.497,5.969 5.718,6.795 14.485,11.856 19.344,10.554 LED4.3
OUTR13: LED8.3 U1.15 | length 19.7
  Top Layer w0.254: U1.15 4.939,5.935 5.233,7.031 5.244,7.072 14.482,12.406 20.153,10.887 LED8.3
OUTR14: LED12.3 U1.16 | length 21
  Top Layer w0.254: U1.16 4.381,5.902 4.777,7.38 15.964,13.839 16.295,15.073 16.295,15.806 15.212,16.888 LED12.3 ; LED12.3@15.094,18.785 LED12.3@15.137,18.71
OUTR15: LED16.3 U1.17 | length 30
  Top Layer w0.254: U1.17 3.797,5.913 4.265,7.662 14.67,13.669 15.203,15.658 13.23,19.074 10.157,19.898 8.205,19.898 6.86,21.243 LED16.3
PWCLK: J1.7 U1.18 U2.18 U3.18 | length 37.3
  Top Layer w0.254: U2.18 -6.173,0.817 -6.018,0.238 v1(-5.736,0.075) ; U3.18 2.944,-5.75 3.194,-5.5 v1(3.194,-4.856) ; v1(2.094,5.7) 2.712,6.057 3.214,5.923 U1.18
  Bottom Layer w0.254: J1.7 -1.276,-3.212 ccw(c-1.037,-3.212) -1.206,-3.381 ccw(c-0.348,-2.523) -0.348,-3.736 -0.262,-3.736 cw(c-0.262,-5.407) 0.92,-4.226 1.145,-4.451 cw(c0.653,-4.944) 1.349,-4.944 ; v1(2.094,5.7) 1.349,6.445 ccw(c-0.006,5.089) -0.006,7.006 -1.448,7.006 ccw(c-1.448,4.466) -3.244,6.262 -3.61,5.896 ccw(c-1.814,4.1) -4.354,4.1 -4.354,3.204 cw(c-6.894,3.204) -5.097,1.408 -5.245,1.261 ccw(c-4.059,0.075) v1(-5.736,0.075) -5.736,-2.789 -5.736,-3.029 ccw(c-3.196,-3.029) -4.992,-4.825 -4.961,-4.856 ccw(c-3.165,-3.06) -3.165,-5.6 -1.972,-5.6 ccw(c-1.972,-4.234) -1.006,-5.2 cw(c-0.388,-5.818) -0.388,-4.944 1.349,-4.944 ; v1(3.194,-4.856) cw(c2.982,-4.644) 2.982,-4.944 1.349,-4.944
SDI: J1.1 U1.23 | length 3.6
  Top Layer w0.254: v1(3.488,0.754) 4.022,0.754 4.281,1.013 4.409,1.492 4.469,1.718 U1.23
  Bottom Layer w0.254: J1.1@2.534,1.8 cw(c2.534,0.709) 3.306,1.48 3.335,1.451 cw(c2.965,1.081) 3.488,1.081 v1(3.488,0.754)
SDO: J1.10 U3.19 | length 3.6
  Top Layer w0.254: U3.19 1.694,-5.1 2.194,-4.6 v1(2.194,-3.9)
  Bottom Layer w0.254: v1(2.194,-3.9) ccw(c1.373,-3.079) 2.534,-3.079 J1.10

## Polygon pours and split planes (outlines as drawn)
+VBATT on Bottom Layer "+VBATT_L02_P013" (solid, pour order 13): -30,0 ccw(c0,0) 0,-30 ccw(c0,0) 30,0 ccw(c0,0) 0,30 ccw(c0,0)
GND on Bottom Layer "GND_L02_P010" (solid, pour order 10): -25,0 ccw(c0,0) 0,-25 ccw(c0,0) 25,0 ccw(c0,0) 0,25 ccw(c0,0)
no net on Top Layer "NONET_L01_P015" (solid, pour order 15): -9.247,17.25 -9.247,15.492 ccw(c-8.755,15.492) -8.755,15 8.753,15 ccw(c8.753,15.5) 9.253,15.5 9.253,17.25 ccw(c8.753,17.25) 8.753,17.75 -8.747,17.75 ccw(c-8.747,17.25)

## Silkscreen, mask and mechanical layers (free items; w line width, h text height)
Top Solder:
  text "Juno LED Driver V1R1" at -7.75,15.75 h2
Mechanical 1:
  circle w1: c0,0 r30
Mechanical 2:
  lines w0.406: -30,0 30,0 ; -27.716,-11.481 27.716,11.481 ; -27.716,11.481 27.716,-11.481 ; -21,-21 21,21 ; -21,21 21,-21 ; -11.481,-27.716 11.481,27.716 ; -11.481,27.716 11.481,-27.716 ; 0,-30 0,30
Mechanical 3:
  lines w0.406: -25.981,-15 0,0 ; 0,30 0,0 ; 25.981,-15 0,0
Mechanical 4:
  lines w0.406: -30,0 30,0 ; 0,-30 0,30
Mechanical 5:
  pour cut-out: 10.094,-21.77